# EAGLE board 8-MC_v01 (EAGLE 9.7.0)
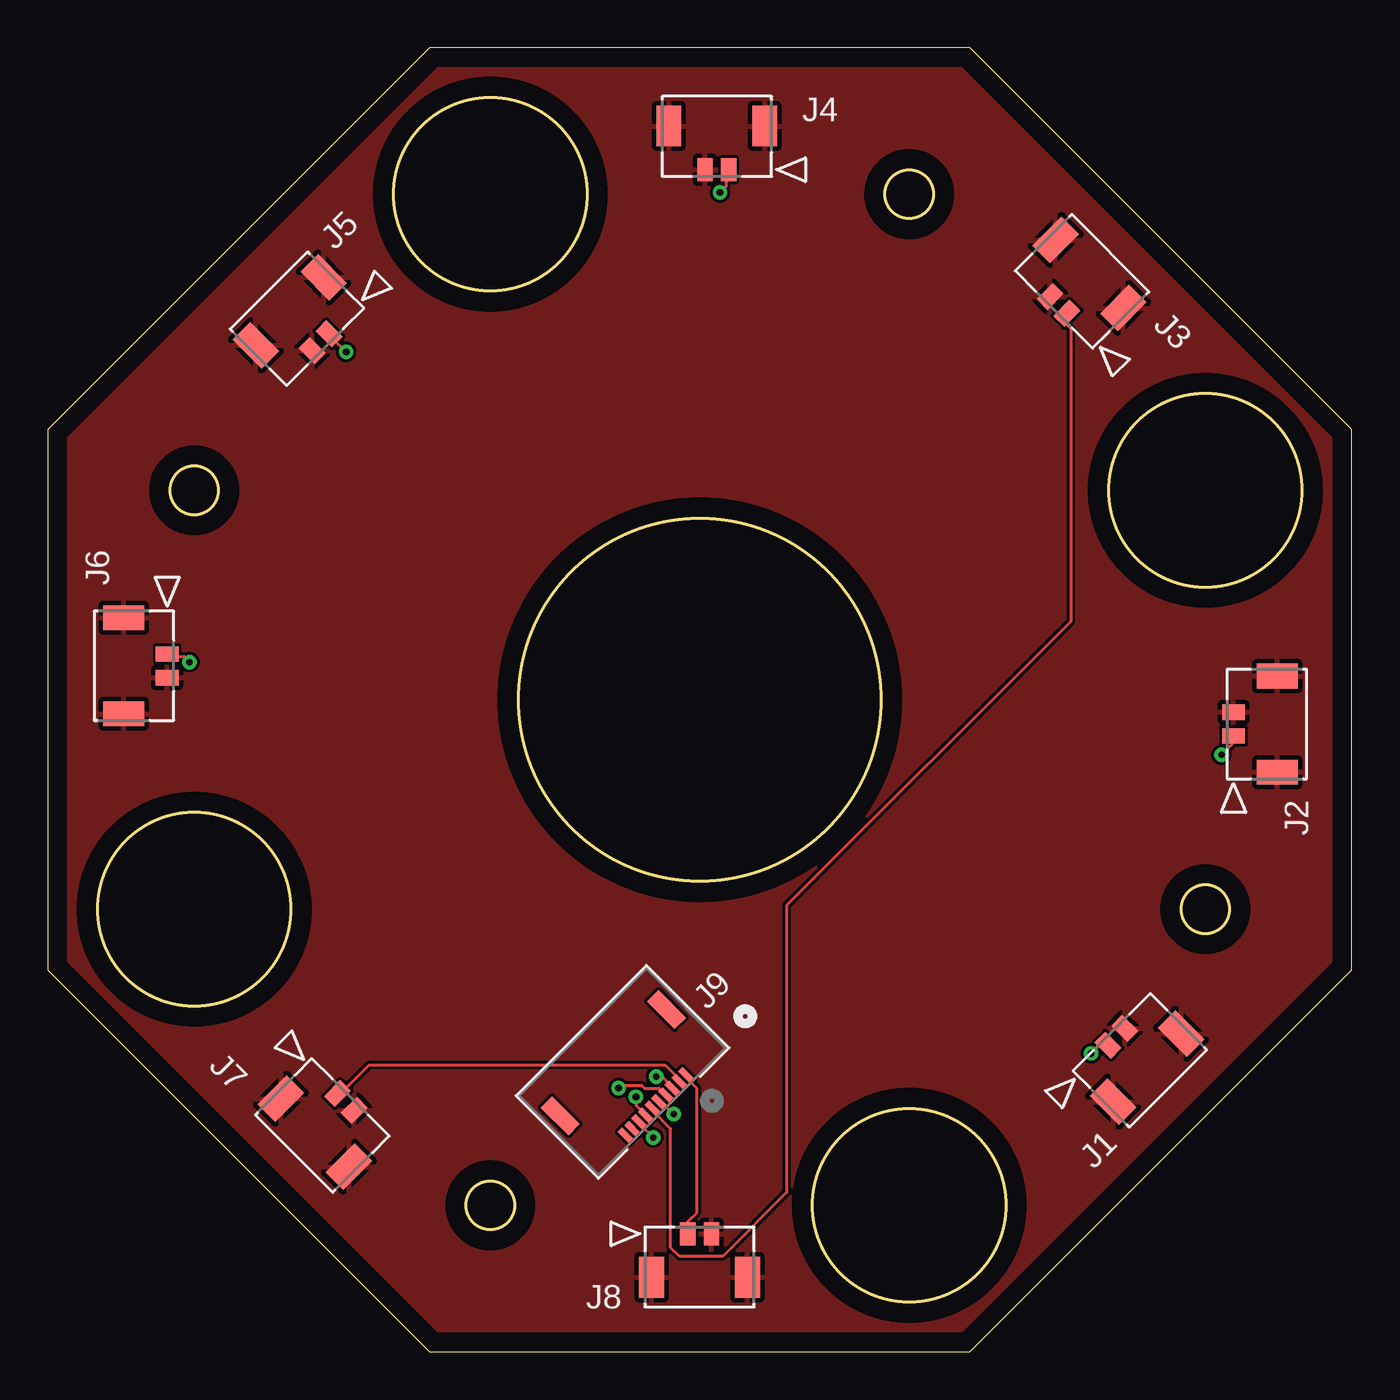
[diagram p0: board, top side]
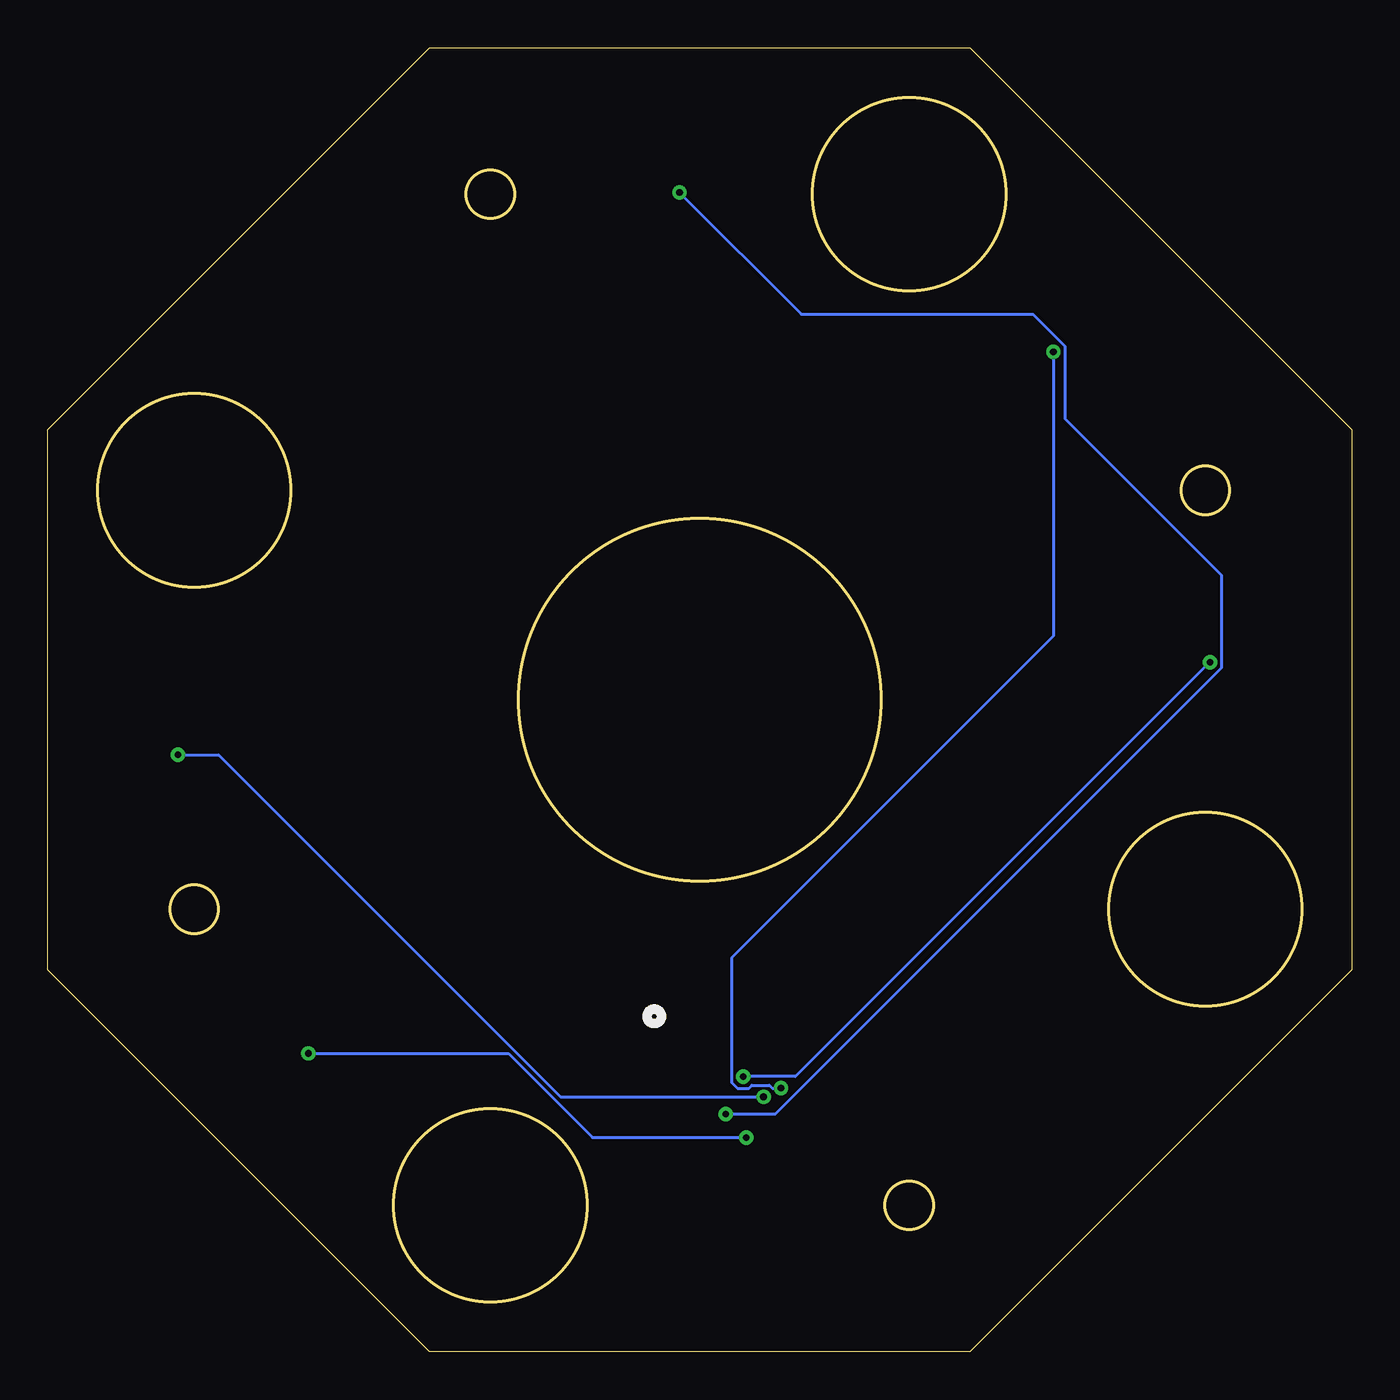
[diagram p1: board, bottom side, seen from below]

Size 68.58 x 68.58 mm. Coordinates in mm from the lower left corner, seen from the top.
Outline: 0,48.49 0,20.09 20.09,0 48.49,0 68.58,20.09 68.58,48.49 48.49,68.58 20.09,68.58 0,48.49
Outline: circle at 60.88,23.28 radius 1.27
Outline: circle at 45.3,60.88 radius 1.27
Outline: circle at 23.28,60.88 radius 5.08
Outline: circle at 7.7,23.28 radius 5.08
Outline: circle at 23.28,7.7 radius 1.27
Outline: circle at 7.7,45.3 radius 1.27
Outline: circle at 34.29,34.29 radius 9.53
Outline: circle at 60.88,45.3 radius 5.08
Outline: circle at 45.3,7.7 radius 5.08
Copper layers (1*16): Top 0.035mm / dielectric 1.5mm / Bottom 0.035mm
Design rules "default": minimum track width 6mil, minimum drill 0.35mm, track to track 6mil, track to pad 6mil, pad to pad 6mil, via to via 6mil, smd to smd 6mil, copper to edge 40mil, drill to drill 6mil, minimum pad ring 10mil, minimum via ring 8mil, stop-mask expansion 4mil, vias tented up to drill 0mil, thermal gap 10mil

## Footprints (pad centres in the part's own frame; a part is rotated, then mirrored left to right if it is on the bottom)
CON_5055670281 = smd 0.8 x 1.2: 1 0,0; 2 -1.25,0 | smd 1.3 x 2.15: 3 1.9,2.295; 4 -3.15,2.295
CONN10_FH52-10S-0.5SH_HIR = smd 0.33 x 0.889: 1 -2.25,2.502; 2 -1.75,2.502; 3 -1.25,2.502; 4 -0.75,2.502; 5 -0.25,2.502; 6 0.25,2.502; 7 0.75,2.502; 8 1.25,2.502; 9 1.75,2.502; 10 2.25,2.502 | smd 0.838 x 2.057: 11 -3.95,-0.673; 12 3.95,-0.673

## Placement (x,y rotation side)
J1  5055670281CON_5055670281  [CON_5055670281]  55.75,16.13 225 top
J2  5055670281CON_5055670281  [CON_5055670281]  62.36,32.38 270 top
J3  5055670281CON_5055670281  [CON_5055670281]  53.6,54.61 315 top
J4  5055670281CON_5055670281  [CON_5055670281]  35.81,62.16 0 top
J5  5055670281CON_5055670281  [CON_5055670281]  14.79,53.53 45 top
J6  5055670281CON_5055670281  [CON_5055670281]  6.29,36.7 90 top
J7  5055670281CON_5055670281  [CON_5055670281]  15.24,13.59 135 top
J8  5055670281CON_5055670281  [CON_5055670281]  33.66,6.21 180 top
J9  FH52-10S-0.5SHCONN10_FH52-10S-0.5SH_HIR  [CONN10_FH52-10S-0.5SH_HIR]  30.23,14.73 225 top

## Library data of the parts
J1-J8 = 2021-08-12_20-40-52_Library; COPYRIGHT: Copyright (C) 2021 Ultra Librarian. All rights reserved.; MANUFACTURER_PART_NUMBER: 5055670281; MFR_NAME: Molex Connector Corporation
J9 = 2021-08-09_13-11-40_Library; COPYRIGHT: Copyright (C) 2021 Ultra Librarian. All rights reserved.; DIGI-KEY_PART_NUMBER_1: H126109TR-ND; DIGI-KEY_PART_NUMBER_2: H126109CT-ND; DIGI-KEY_PART_NUMBER_3: H126109DKR-ND; MANUFACTURER_PART_NUMBER: FH52-10S-0.5SH; MFR_NAME: Hirose

## Nets
GND: J1.2 J1.3 J1.4 J2.2 J2.3 J2.4 J3.2 J3.3 J3.4 J4.2 J4.3 J4.4 J5.2 J5.3 J5.4 J6.2 J6.3 J6.4 J7.2 J7.3 J7.4 J8.2 J8.3 J8.4
N$1: J8.1 J9.1
N$2: J7.1 J9.2
N$3: J6.1 J9.3
N$4: J5.1 J9.4
N$5: J1.1 J9.8
N$6: J2.1 J9.7
N$7: J3.1 J9.6
N$8: J4.1 J9.5

## Tracks (layer width: path | path; a pad name or v marks a point on that pad's centre or on a via)
GND
  pour Top: 20.12,0.08 48.46,0.08 68.51,20.12 68.51,48.46 48.46,68.51 20.12,68.51 0.08,48.46 0.08,20.12
N$1
  Top 0.152: J9.1 33.68,14.48 33.68,14.33 34.14,13.87 34.14,7.32 33.68,6.86 33.68,6.25 J8.1
N$2
  Top 0.152: J9.2 33.22,14.33 32.46,15.09 16.92,15.09 15.39,13.56 J7.1
N$3  (via drill 0.35)
  Top 0.152: v32,14.48 32.31,14.48 32.77,14.02 32.77,13.87 J9.3 | v7.47,36.27 7.16,36.58 6.4,36.58 J6.1
  Bottom 0.152: v32,14.48 29.26,14.48 v7.47,36.27
N$4  (via drill 0.35)
  Top 0.152: v30.02,13.87 30.18,14.02 31.24,14.02 31.39,13.87 32.16,13.87 32.46,13.56 J9.4 | v15.7,52.58 14.78,53.49 J5.1
  Bottom 0.152: v30.02,13.87 30.48,13.87 30.63,14.02 31.55,14.02 31.7,13.87 32.31,13.87 32.61,14.17 32.61,20.73 15.7,37.64 v15.7,52.58
N$5  (via drill 0.35)
  Top 0.152: v31.85,11.28 31.24,11.89 31.24,12.04 J9.8 | v54.86,15.7 55.32,16.15 55.63,16.15 J1.1
  Bottom 0.152: v31.85,11.28 39.93,11.28 44.35,15.7 v54.86,15.7
N$6  (via drill 0.35)
  Top 0.152: v30.94,13.41 30.94,12.95 31.39,12.5 J9.7 | v61.72,31.39 62.33,32 62.33,32.31 J2.1
  Bottom 0.152: v30.94,13.41 41.6,13.41 59.59,31.39 v61.72,31.39
N$7
  Top 0.152: J9.6 31.85,12.65 32.77,11.73 32.77,5.49 33.22,5.03 35.51,5.03 38.86,8.38 38.86,23.47 53.8,38.41 53.8,53.8 53.49,54.1 53.49,54.56 J3.1
N$8  (via drill 0.35)
  Top 0.152: v32.92,12.5 32.31,13.11 J9.5 | v35.36,60.96 35.66,61.27 35.66,61.87 35.81,62.03 J4.1
  Bottom 0.152: v32.92,12.5 30.33,12.5 6.86,35.97 6.86,40.84 15.09,49.07 15.09,52.88 16.76,54.56 28.96,54.56 v35.36,60.96